# Altium PCB Power Supply.PcbDoc
Units mm, origin at the board's own origin, x right, y up, seen from the top; angles counter-clockwise.
Board outline 72.27 x 45.97 mm, 2 copper layers (Top Layer, Bottom Layer), stack 1.1 mm thick; 16 components, 10 nets, 46 pads, 0 vias.
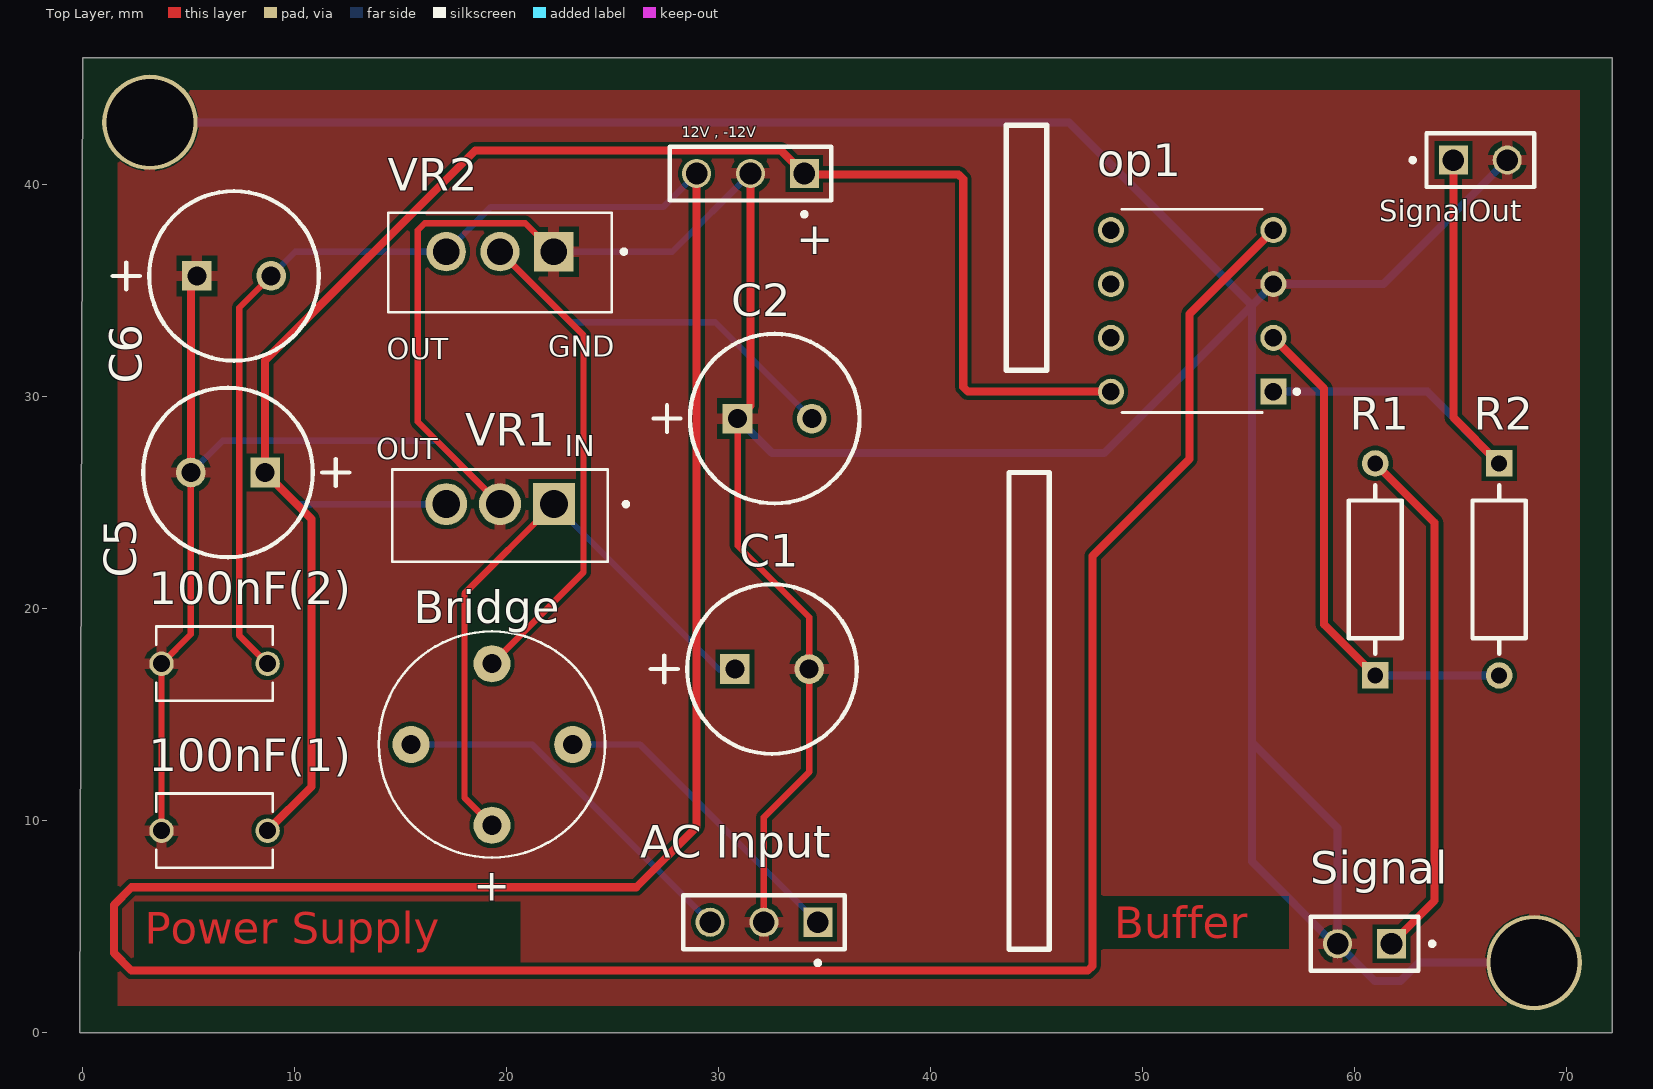
[diagram p0: Top Layer view]
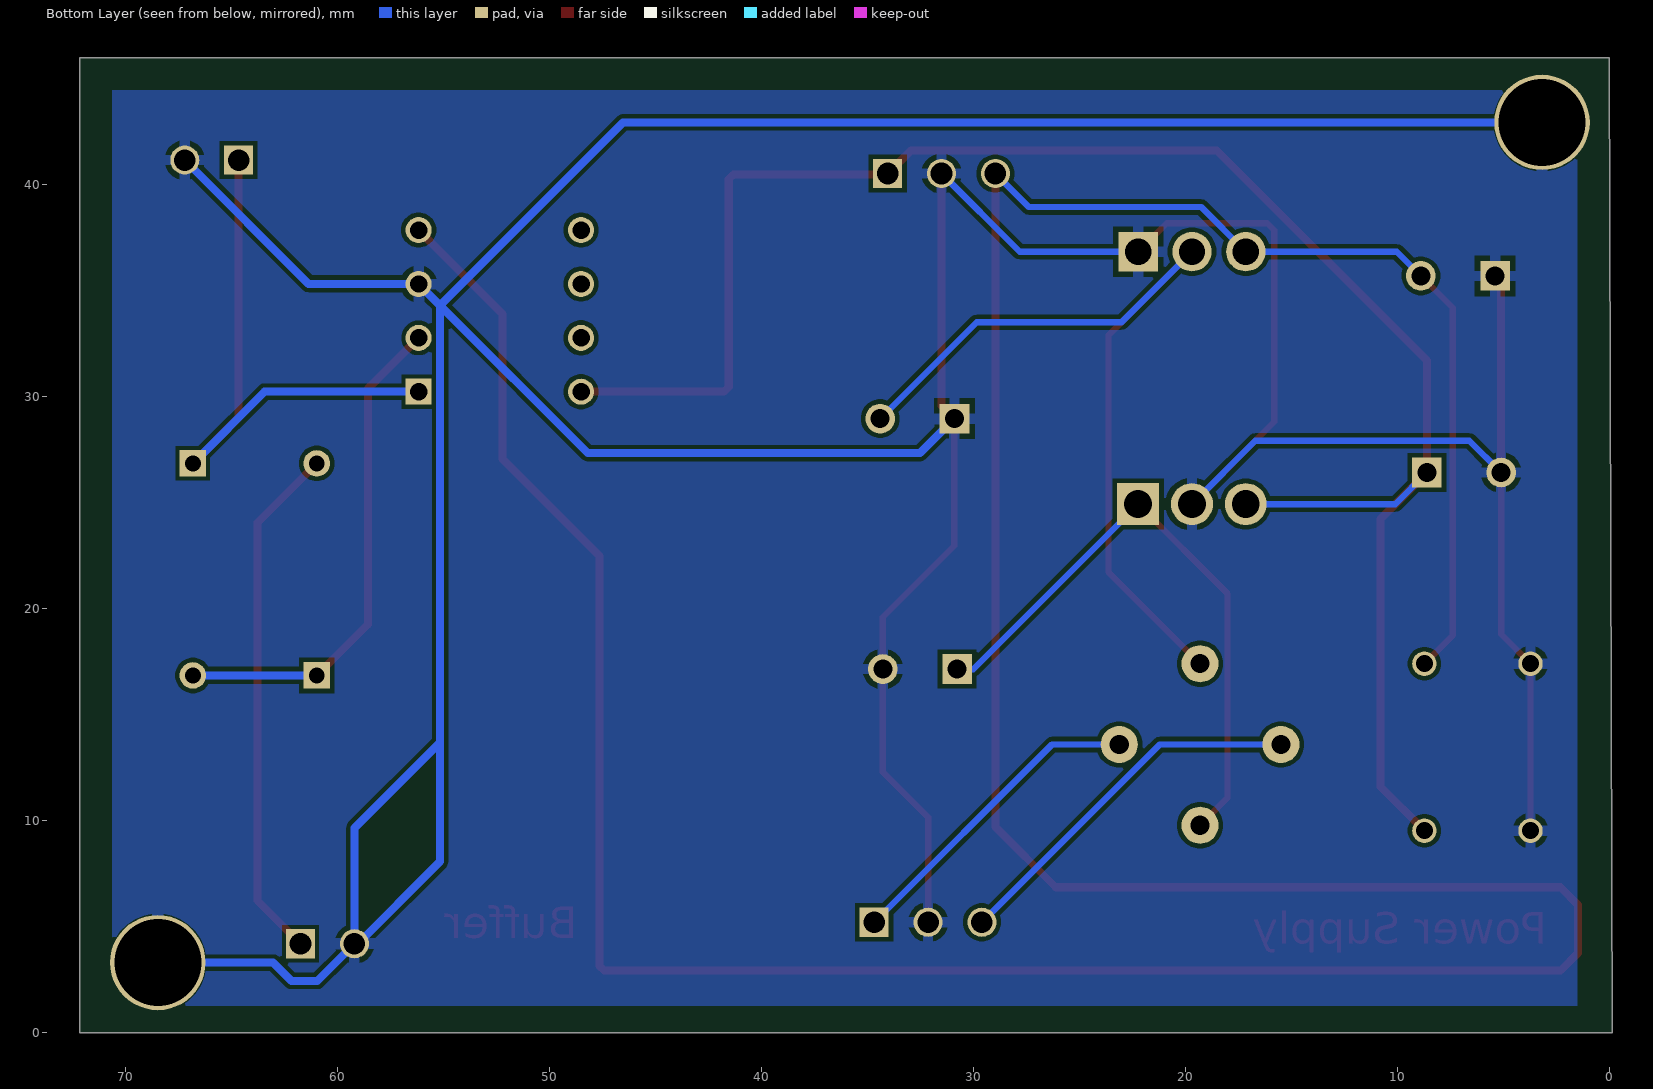
[diagram p1: Bottom Layer view, seen from below]

## Layer stack, top to bottom
Top Solder: solder mask 0.05, SM-001, Dk 4
Top Layer: signal copper 0.1
Dielectric 1: dielectric 0.9, FR-4, Dk 4.8
Bottom Layer: signal copper 0.1
Bottom Solder: solder mask 0.05, SM-001, Dk 4

## Board outline
0,45.974 72.134,45.974 72.134,0 -0.135,0

## Design rules (kind name [scope] priority, off if disabled: settings)
BoardOutlineClearance [All] p1: gap=0.2 ignorepadtopadclearanceinfootprint=FALSE except(0.4: Arc-SplitBarrior Arc-SplitContinuation Track-SplitBarrior Track-SplitContinuation SMDPad-SplitBarrior SMDPad-SplitContinuation THPad-SplitBarrior THPad-SplitContinuation Via-SplitBarrior Via-SplitContinuation Fill-SplitBarrior Fill-SplitContinuation Poly-SplitBarrior Poly-SplitContinuation Region-SplitBarrior Region-SplitContinuation Text-SplitBarrior Text-SplitContinuation)
Clearance "Clearance Bottom Layer" [OnLayer('Bottom Layer')] p1: gap=0.203 ignorepadtopadclearanceinfootprint=TRUE except(0.254: Arc-Text Track-Text SMDPad-Text THPad-Text Via-Text Fill-Text Poly-Text Region-Text Text-Text)
Clearance "Clearance Top Layer" [OnLayer('Top Layer')] p2: gap=0.203 ignorepadtopadclearanceinfootprint=TRUE except(0.254: Arc-Text Track-Text SMDPad-Text THPad-Text Via-Text Fill-Text Poly-Text Region-Text Text-Text)
Clearance [All] p3: gap=0.2 ignorepadtopadclearanceinfootprint=FALSE except(0.089: Arc-Arc Arc-Track Arc-SMDPad Track-Track Track-SMDPad SMDPad-SMDPad; 0.127: Arc-Via Track-Via SMDPad-Via THPad-Via Via-Via; 0.254: Arc-Text Track-Text SMDPad-Text THPad-Text Via-Text Fill-Text Poly-Text Region-Text Text-Text)
HoleSize [All] p1: absolutevalues=TRUE maxlimit=6.3 minlimit=0.2 maxpercent=80.000 minpercent=20.000
MinimumAnnularRing [All] p1: minimumring=0.076
MinimumSolderMaskSliver [All] p1: minsoldermaskwidth=0.1
PolygonConnect PolygonConnect_1 [All] p1: thpad.connectstyle=Relief thpad.reliefconductorwidth=0.508 thpad.reliefentries=4 thpad.polygonreliefangle="90 Angle" thpad.airgapwidth=0.254 smdpad.connectstyle=Relief smdpad.reliefconductorwidth=0.508 smdpad.reliefentries=4 smdpad.polygonreliefangle="90 Angle" smdpad.airgapwidth=0.254 via.connectstyle=Direct via.reliefconductorwidth=0.508 via.reliefentries=4 via.polygonreliefangle="90 Angle" via.airgapwidth=0.254
RoutingCorners [All] p1: cornerstyle=Round minsetback=2.54 maxsetback=2.54
RoutingVias [All] p1: holewidth=0.5 width=1 viastyle="Through Hole" minholewidth=0.2 minwidth=0.45 maxholewidth=1 maxwidth=2
SilkToSilkClearance [All] p1: silktosilkclearance=0.1
SilkToSolderMaskClearance [IsPad] p1: minsilkscreentomaskgap=0.1 clearancetoexposedcopper=TRUE
SolderMaskExpansion [All] p1: expansion=0.102 istentingtop=FALSE
Width [All] p1: maxlimit=2.54 minlimit=0.089 preferedwidth=0.381
25 further rules are at their usual default settings.

## Components (designator, comment, footprint, x,y, rotation, side; value= is the part's Value field where it differs from the comment)
"12V , -12V" "TSW-101-26-L-T" SAMTEC_TSW-101-26-L-T 34.034,40.513 r90 top
100nF(1) "FG26X7R2E104KNT06" CAPRB500W50L550T350H600 6.221,9.525 r0 top
100nF(2) "FG26X7R2E104KNT06" CAPRB500W50L550T350H600 6.221,17.399 r180 top
"AC Input" "TSW-101-26-L-T" SAMTEC_TSW-101-26-L-T 34.669,5.207 r90 top
Bridge "2W10" 2W10 19.302,13.589 r180 top
C1 "ECA1HM101" CAPPR65-350-1150X800X1250 32.51,17.145 r0 top value=1000µF
C2 "ECA1HM101" CAPPR65-350-1150X800X1250 32.637,28.956 r0 top value=1000µF
C5 "ECA1HM101" CAPPR65-350-1150X800X1250 6.856,26.416 r180 top value=10µF
C6 "ECA1HM101" CAPPR65-350-1150X800X1250 7.138,35.687 r0 top value=10µF
op1 "NE5532N" DIP766W45P254L1016H533Q8 52.322,34.036 r180 top
R1 "MRS25000C1001FCT00" FP-MRS25-MFG 60.958,21.844 r90 top
R2 "MRS25000C1001FCT00" FP-MRS25-MFG 66.8,21.844 r270 top
Signal "HW-02-08-F-S-330-080" SAMTEC_HW-02-08-F-S-330-080 61.722,4.191 r180 top
SignalOut "HW-02-08-F-S-330-080" SAMTEC_HW-02-08-F-S-330-080 64.641,41.148 r0 top
VR1 "LM7812CT" TO253P1057X470X2040-3 19.683,24.384 r180 top
VR2 "LM7912CT/NOPB" TO254P1054X470X1955-3 19.683,36.83 r180 top

## Footprints (in the part's own frame and the unit in brackets; to place one, negate y for a bottom-side part, rotate by r counter-clockwise, add the part's x,y. Pads: shape width x height; smd on the part's side, far side on the other; paste and mask are expansions set on the pad)
2W10 [mm]
  round 1.75 hole 0.9: +VCC(0,3.81) -VDD(0,-3.81) AC1(-3.81,0) AC2(3.81,0)
  silkscreen extent -5.33,-5.33 5.33,5.33
CAPPR65-350-1150X800X1250 [mm] "THD, 2-Leads, Dia 8mm, Pin Spacing 3.5mm"
  rect 1.4x1.4 hole 0.9: 1(-1.75,0)
  round 1.4 hole 0.9: 2(1.75,0)
  silkscreen extent -5.72,-4 4,4, body extent -4,-4 3.95,4, height 12.5
CAPRB500W50L550T350H600 [mm]
  round 1.15 hole 0.8: 1(-2.5,0) 2(2.5,0)
  silkscreen extent -2.75,-1.75 2.75,1.75, body extent -2.75,-1.75 2.75,1.75, height 3
DIP766W45P254L1016H533Q8 [mm]
  rect 1.23x1.23 hole 0.82: 1(-3.83,3.81)
  round 1.23 hole 0.82: 2(-3.83,1.27) 3(-3.83,-1.27) 4(-3.83,-3.81) 5(3.83,-3.81) 6(3.83,-1.27) 7(3.83,1.27) 8(3.83,3.81)
  silkscreen extent -5.03,-4.8 3.3,4.8
FP-MRS25-MFG [mm]
  rect 1.25x1.25 hole 0.75 paste-1000 mask+0: 1(-5,0)
  round 1.25 hole 0.75 paste-1000 mask+0: 2(5,0)
  silkscreen extent -3.97,-1.25 3.97,1.25, body extent -5.72,-1.35 5.72,1.35, height 0.25
SAMTEC_HW-02-08-F-S-330-080 [mm]
  rect 1.37x1.37 hole 1.02: 01(0,0)
  round 1.37 hole 1.02: 02(2.54,0)
  silkscreen extent -2.02,-1.27 3.81,1.27
SAMTEC_TSW-101-26-L-T [mm]
  rect 1.37x1.37 hole 1.02: 01(0,0)
  round 1.37 hole 1.02: 02(0,2.54) 03(0,5.08)
  silkscreen extent -2.02,-1.27 1.27,6.35
TO253P1057X470X2040-3 [mm]
  rect 1.98x1.98 / inner round 1.98 / far side rect 1.98x1.98 hole 1.32: 1(-2.535,-0.54)
  round 1.98 hole 1.32: 2(0,-0.54) 3(2.535,-0.54)
  silkscreen extent -6.04,-2.18 5.08,2.18, body extent -5,-1.84 5,2.66, height 18.95
TO254P1054X470X1955-3 [mm]
  rect 1.86x1.86 / inner round 1.86 / far side rect 1.86x1.86 hole 1.24: 1(-2.54,0)
  round 1.86 hole 1.24: 2(0,0) 3(2.54,0)
  silkscreen extent -5.94,-1.84 5.27,2.86, body extent -5.08,-1.49 5.08,2.71, height 22.86

## Part data
"12V , -12V" "AC Input" Signal SignalOut: Package=None, Availability=Unavailable, Price=None
  "12V , -12V" "AC Input": MP=TSW-101-26-L-T
  Signal SignalOut: MP=HW-02-08-F-S-330-080
100nF(1) 100nF(2): "0.1ÂµF Â±10% 250V Ceramic Capacitor X7R Radial", Package="Radial TDK", Availability="In Stock", Check_prices=https://www.snapeda.com/parts/FG26X7R2E104KNT06/TDK/view-part/?ref=eda, MF=TDK, MP=FG26X7R2E104KNT06, Price=None, Purchase-URL=https://pricing.snapeda.com/search/part/FG26X7R2E104KNT06/?ref=eda, SnapEDA_Link=https://www.snapeda.com/parts/FG26X7R2E104KNT06/TDK/view-part/?ref=snap
Bridge: "Bridge Rectifier Single Phase Standard 1 kV Through Hole WOM", Package=None, Check_prices=https://www.snapeda.com/parts/2W10/MDD/view-part/?ref=eda, MF=MDD, MP=2W10, SnapEDA_Link=https://www.snapeda.com/parts/2W10/MDD/view-part/?ref=snap
C1 C2 C5 C6: library part CMP-001-00026-7, "Aluminum Electrolytic Capacitor, 100 uF, +/- 20%, 50 V, -40 to 85 degC, 2-Pin THD, RoHS, Bulk", Capacitor Type=Electrolytic, Case/Package=Radial, Manufacturer=Panasonic, Max Operating Temperature=85°C, Min Operating Temperature=-40°C, Package Description="2-Pin Radial Lead, Dia 8 mm, Height 12.5 mm", Package Quantity=200, Package Reference=CAPPR65-350-1150X800X1250, Ripple Current=250mA, Tolerance=20%, Voltage Rating=50V, Datasheet URL=https://industrial.panasonic.com/cdbs/www-data/pdf/RDF0000/ABA0000C1218.pdf, Datasheet Version="Rev. 05, 10/2016", Diameter=8mm, Lead Pitch=3.5mm, Manufacturer URL=http://www.panasonic.com/, Mounting Technology=TH, Packaging=Bulk, Pins=2, Ripple Current (AC)=250mA, RoHS Compliant=True
op1: "General Purpose Amplifier 2 Circuit 8-PDIP", Package="DIP-8 Rochester Electronics", Availability=Unavailable, MF="ON Semiconductor", MP=NE5532N, Price=None, SnapEDA_Link=https://www.snapeda.com/parts/NE5532N/ON%20Semiconductor/view-part/2701565/?ref=snap
R1 R2: library part CMP-02408-000051-1, "RES 1K OHM 0.6W 1% AXIAL", Case/Package=Axial, Max Operating Temperature=155°C, Max Power Dissipation=600mW, Min Operating Temperature=-55°C, Package Quantity=5000, Resistance=1kR, Resistance Tolerance=1%, Resistor Type="Metal Film", Temperature Coefficient=50ppm/°C, Voltage Rating=350V, Construction=Cylindrical, Contact Plating=Tin, Diameter=2.5mm, Lead Diameter=0.6mm, Lead Free="Lead Free", Length=6.5mm, Military Standard=Not, Mount="Through Hole", Number of Pins=2, Number of Terminations=2, Packaging="Tape and Reel", Power Rating=600mW, Radiation Hardening=No, RoHS Compliant=Yes, Series=MRS25, Technology="THIN FILM", Termination=Axial, Tolerance=1%, Voltage Rating (DC)=350V, Weight=0.00776oz, Width=2.5mm
VR1: "Linear Voltage Regulator IC Positive Fixed 1 Output  1A TO-220-3", Package=TO-220, Availability=Unavailable, Check_prices=https://www.snapeda.com/parts/LM7812CT/Onsemi/view-part/?ref=eda, MF="ON Semiconductor", MP=LM7812CT, Price=None, SnapEDA_Link=https://www.snapeda.com/parts/LM7812CT/Onsemi/view-part/?ref=snap
VR2: "1.5-A, negative linear voltage regulator", Package="TO-220-3 Texas Instruments", Availability="In Stock", Check_prices=https://www.snapeda.com/parts/LM7912CT/NOPB/Texas+Instruments/view-part/?ref=eda, MF="Texas Instruments", MP=LM7912CT/NOPB, Price=None, Purchase-URL=https://pricing.snapeda.com/search/part/LM7912CT/NOPB/?ref=eda, SnapEDA_Link=https://www.snapeda.com/parts/LM7912CT/NOPB/Texas+Instruments/view-part/?ref=snap

## Free pads (board coordinates)
  round 4.5 hole 4.1: 1(68.453,3.302) 2(3.175,42.926)

## Nets (pads, with @x,y where several pads share a name; then routed paths per layer and width w, separated by ;. In a path a pad name is that pad's centre, name@x,y a point inside that pad or via, vN(x,y) a via of type N, cw(c..) or ccw(c..) an arc to the next point about the centre after c; other vN are vias at no path point)
12V: 100nF(1).2 "12V , -12V.01" C5.1 op1.8 VR1.3 | length 87.5
  Top Layer w0.381: 8.721,9.525 10.793,11.597 10.793,24.229 C5.1 8.606,31.696 18.515,41.605 32.942,41.605 34.034,40.513 34.072,40.475 41.304,40.475 41.527,40.252 41.527,30.449 41.75,30.226 op1.8
  Bottom Layer w0.3: C5.1 10.098,24.924 VR1.3
-12V: 100nF(2).1 "12V , -12V.03" C6.2 op1.4 VR2.3 | length 188.4
  Top Layer w0.3: 8.721,17.399 7.39,18.731 7.39,34.188 C6.2
  Top Layer w0.381: 28.954,40.513 28.954,9.703 26.109,6.858 2.31,6.858 1.471,6.02 1.471,3.759 2.31,2.921 47.402,2.921 47.625,3.144 47.625,22.479 52.197,27.051 52.197,33.891 op1.4
  Bottom Layer w0.3: C6.2 10.031,36.83 VR2.3 19.251,38.938 27.379,38.938 28.954,40.513
AC1: "AC Input.01" Bridge.AC1 | length 15
  Bottom Layer w0.3: Bridge.AC1 26.287,13.589 34.669,5.207
AC2: "AC Input.03" Bridge.AC2 | length 17.6
  Bottom Layer w0.3: Bridge.AC2 21.207,13.589 29.589,5.207
GND: 100nF(1).1 100nF(2).2 "12V , -12V.02" "AC Input.02" C1.2 C2.1 C5.2 C6.1 op1.3 pad.1 pad.2 Signal.02 SignalOut.02 VR1.2 VR2.1 | length 286
  Top Layer w0.3: 3.721,9.525 3.721,17.399 5.106,18.784 C5.2 ; VR1.2 15.797,28.81 15.797,37.846 16.127,38.176 20.877,38.176 VR2.1 ; C2.1 30.887,22.959 34.26,19.586 C1.2 34.26,12.291 32.129,10.16 32.129,5.207
  Top Layer w0.381: C5.2 5.106,35.405 C6.1 ; C2.1 31.494,29.563 31.494,40.513
  Bottom Layer w0.3: C5.2 6.604,27.915 16.693,27.915 VR1.2 ; VR2.1 27.811,36.83 31.494,40.513
  Bottom Layer w0.381: pad.2 46.507,42.926 55.143,34.29 55.143,8.064 59.182,4.025 Signal.02 ; C2.1 32.513,27.33 48.177,27.33 55.142,34.295 ; SignalOut.02 61.339,35.306 op1.3 55.142,34.295 ; pad.1 63.017,3.302 62.154,2.438 60.935,2.438 Signal.02 ; 55.142,34.295 55.142,13.691 59.182,9.65 Signal.02
NetBridge_+VCC: Bridge.+VCC C1.1 VR1.1 | length 29.2
  Top Layer w0.3: Bridge.+VCC 18.007,11.074 18.007,20.713 VR1.1
  Bottom Layer w0.3: VR1.1 29.997,17.145 C1.1
NetBridge_-VDD: Bridge.-VDD C2.2 VR2.2 | length 40.8
  Top Layer w0.3: Bridge.-VDD 23.62,21.717 23.62,32.893 VR2.2
  Bottom Layer w0.3: VR2.2 23.011,33.503 29.841,33.503 C2.2
Netop1_2: op1.2 R1.1 R2.2 | length 23.8
  Top Layer w0.381: op1.2 58.545,30.373 58.545,19.257 R1.1
  Bottom Layer w0.381: R1.1 R2.2
Sigin: R1.2 Signal.01 | length 24.7
  Top Layer w0.381: R1.2 63.754,24.048 63.754,6.223 Signal.01
SigOut: op1.1 R2.1 SignalOut.01 | length 27.2
  Top Layer w0.381: SignalOut.01 64.641,29.003 R2.1
  Bottom Layer w0.381: op1.1 63.418,30.226 R2.1
pads on no net: op1.5 op1.6 op1.7

## Polygon pours and split planes (outlines as drawn)
GND on Top Layer "GND_L01_P000" (solid, remove dead copper, pour order 0): 1.651,44.45 70.612,44.45 70.612,1.27 1.651,1.27
GND on Bottom Layer "GND_L02_P001" (solid, remove dead copper, pour order 1): 1.524,44.45 70.612,44.45 70.612,1.27 1.524,1.27

## Other copper
Top Layer:
  text "Buffer" at 48.641,4.445 h1.5
  text "Power Supply" at 2.919,4.183 h1.5

## Silkscreen, mask and mechanical layers (free items; w line width, h text height)
Top Overlay:
  lines w0.254: 43.559,31.242 44.829,31.242 45.464,31.242 45.464,42.799 43.559,42.799 43.559,31.242 ; 43.686,3.937 45.591,3.937 45.591,26.416 43.686,26.416 43.686,3.937
  text "+" at 33.653,36.703 h1.52
  text "GND" at 21.969,31.877 h1
  text "OUT" at 14.349,31.75 h1
  text "IN" at 22.731,27.178 h1
  text "OUT" at 13.841,27.051 h1
  text "+" at 18.413,6.223 h1.52
Board:
  lines w0.254: 0,0.254 0,45.974 33.782,45.974 72.136,45.974 72.136,0 0.254,0 0,0.254